# Altium PCB Car_PCB.PcbDoc (part 2 of 2)
Units mm, origin at the board's own origin, x right, y up, seen from the top; angles counter-clockwise.
Board outline 64 x 85 mm, 4 copper layers (Top Layer, Ground Plane, Power Plane, Bottom Layer), stack 0.844 mm thick; 133 components, 86 nets, 370 pads, 90 vias.
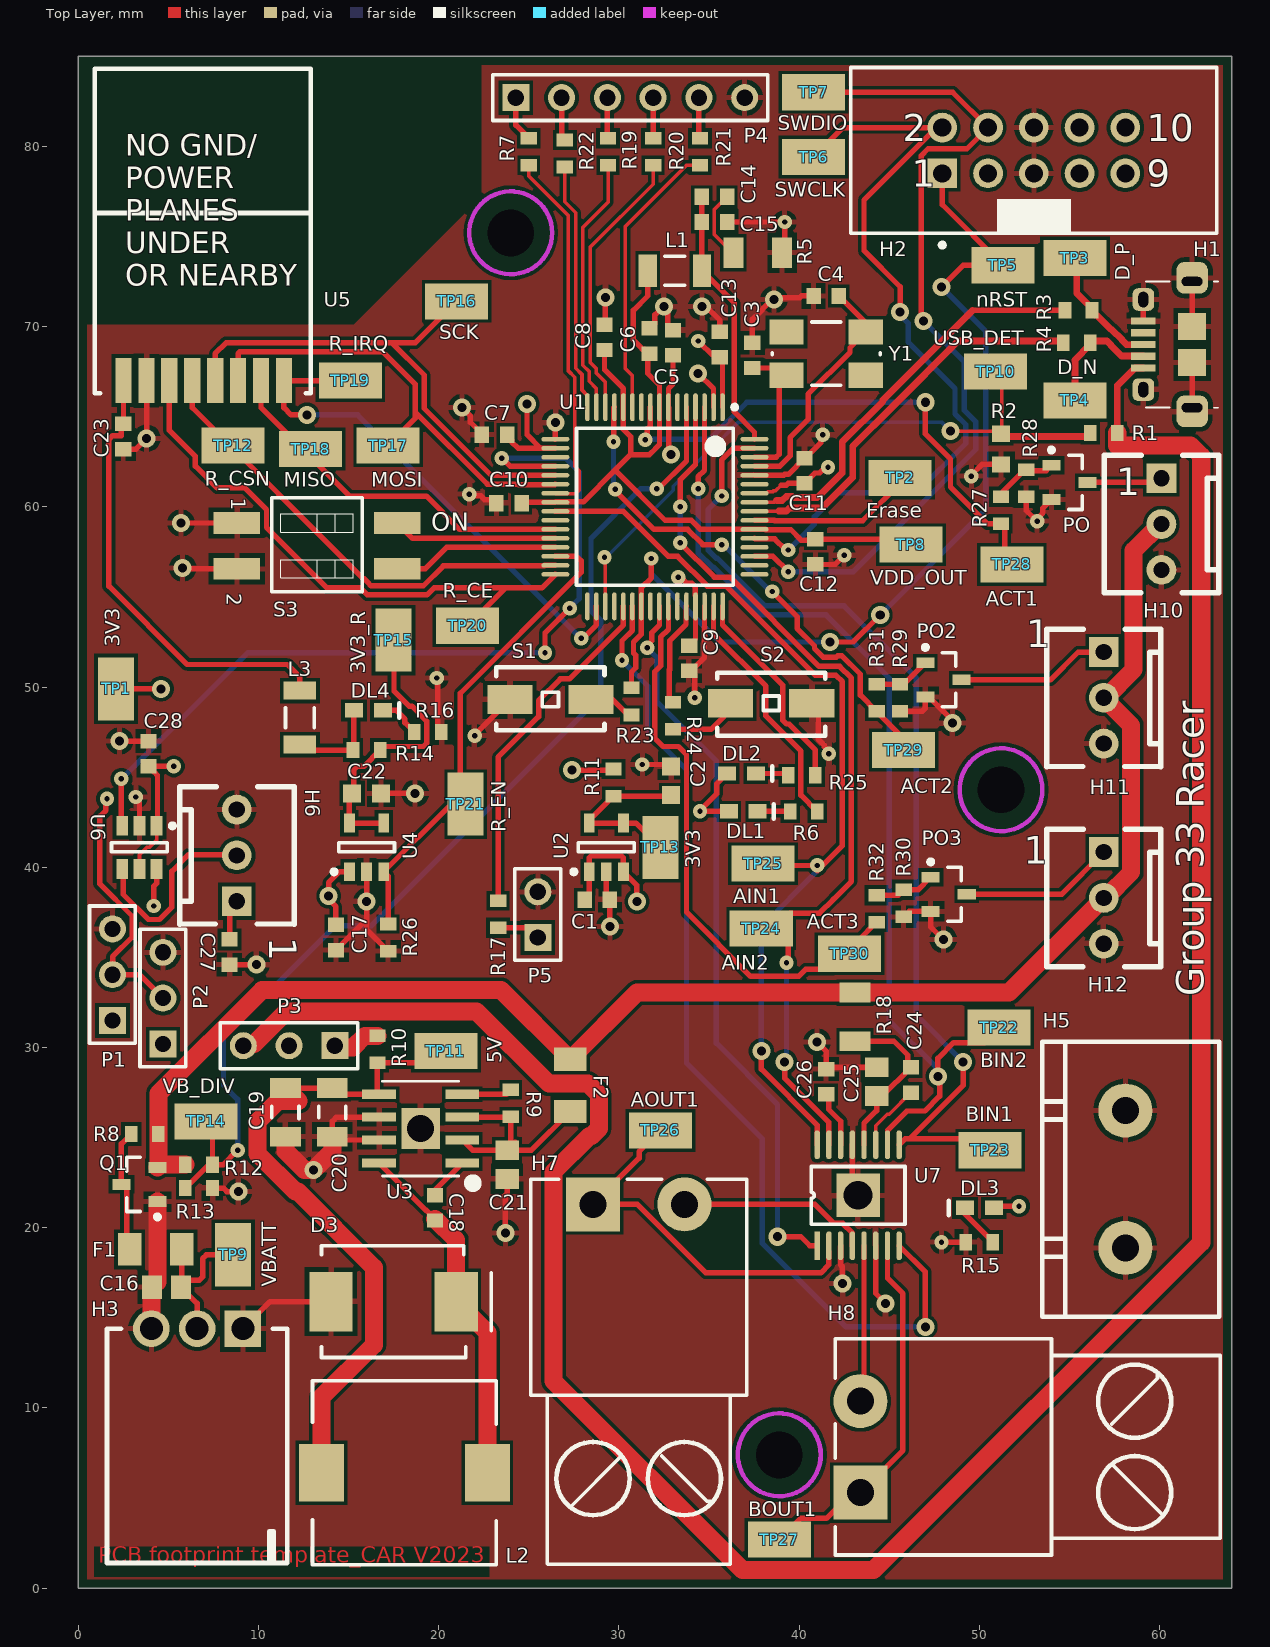
[diagram p0: Top Layer view]

## Via types
v1: diameter 0.8, hole 0.3, Top Layer to Bottom Layer, 45 vias
v2: diameter 1, hole 0.5, Top Layer to Bottom Layer, 43 vias
v3: diameter 2.2, hole 1.6, Top Layer to Bottom Layer, 1 vias
v4: diameter 2, hole 1.5, Top Layer to Bottom Layer, 1 vias

## Nets (pads, with @x,y where several pads share a name; then routed paths per layer and width w, separated by ;. In a path a pad name is that pad's centre, name@x,y a point inside that pad or via, vN(x,y) a via of type N, cw(c..) or ccw(c..) an arc to the next point about the centre after c; other vN are vias at no path point) (continued)
NetP4_5: P4.5 R21.2 | length 2.5
  Top Layer w0.3: P4.5@34.3,82.56 P4.5 34.44,80.51 R21.2
NetP5_1: P5.1 R17.2 | length 2.4
  Top Layer w0.3: R17.2 24.95,36.65 P5.1
NetPO2_1: PO2.1 R29.2 R31.2 | length 3.2
  Top Layer w0.3: R31.2 R29.2 45.8,50.15 PO2.1
NetPO3_1: PO3.1 R30.2 R32.2 | length 3.4
  Top Layer w0.3: R32.2 45.5,38.45 R30.2 46.6,38.75 PO3.1
NetPO_1: PO.1 R27.2 R28.2 | length 3.5
  Top Layer w0.3: R27.2@51.2,60.75 52.5,62.05 R28.2 52.65,62 53.7,62 PO.1
NetR3_2: R3.2 U1.57 | length 22.7
  Top Layer w0.2: U1.57 38.621,60.25 38.739,60.367
  Top Layer w0.3: 49.614,70.9 R3.2@54.699,70.9
  Top Layer w0.381: 38.739,60.346 39.061,60.346 39.298,60.584 39.614,60.584 39.688,60.509 41.027,60.509 42.391,61.873 42.391,63.588 44.641,65.838 44.641,65.926 49.614,70.9
NetR4_2: R4.2 U1.56 | length 22
  Top Layer w0.2: U1.56 38.85,59.75 38.865,59.765
  Top Layer w0.381: 38.865,59.765 39.302,59.765 39.465,59.928 41.268,59.928 42.972,61.632 42.972,63.348 45.222,65.598 45.222,65.6 48.821,69.2 R4.2@54.65,69.2
NetR7_1: R7.1 U1.23 | length 20.6
  Top Layer w0.2: R7.1 25,78.35 27.2,76.15 27.2,67.529 27.55,67.179 27.55,62.25 27.8,62 27.8,60.925 27.6,60.725 26.5,60.725 U1.23 U1.23@26.485,60.76
NetR9_2: R9.2 U3.4 | length 2.8
  Top Layer w0.3: U3.4 23.755,27.405 R9.2
NetR19_1: R19.1 U1.15 | length 14.3
  Top Layer w0.2: U1.15 28.75,66.56 28.35,66.96 28.35,67.51 28,67.86 28,75.5 29.4,76.9 R19.1
NetR20_1: R20.1 U1.14 | length 15.2
  Top Layer w0.2: U1.14 29.25,66.924 28.75,67.424 28.75,67.676 28.4,68.026 28.4,74.4 31.9,77.9 R20.1
NetR21_1: R21.1 U1.11 | length 15.7
  Top Layer w0.2: U1.11 30.75,67.269 30.35,67.669 30.35,75.55 33.75,78.95 R21.1
NetR22_1: R22.1 U1.16 | length 13.8
  Top Layer w0.2: R22.1 27,76.916 27.6,76.316 27.6,67.694 27.95,67.344 27.95,66.475 28.234,66.191 28.234,65.541 U1.16
NetR23_1: R23.1 S1.2 | length 2.4
  Top Layer w0.3: S1.2 29.65,49.3 R23.1@30.5,48.45
NetR24_1: R24.1 S2.2 | length 4.2
  Top Layer w0.3: R24.1 35.1,47.65 S2.2@36.55,49.1
NetTP2_1: TP2.1 U1.55 | length 9.1
  Top Layer w0.3: U1.55 38.616,59.25 38.641,59.225 43.525,59.225 TP2.1@45.7,61.4
nRST: H2.1 R23.2 TP5.1 U1.39 | length 55.5
  Top Layer w0.3: R23.2 30.7,50.846 30.924,51.07 30.924,51.766 30.812,51.877 30.812,52.498 31.25,52.936 U1.39 31.25,55.51 31.8,56.06 v1(31.8,57.132) ; v2(41.7,52.5) 43,52.5 v2(44.5,54) ; v2(47.9,72.2) 49.1,73.4 TP5.1 47.94,76.76 H2.1
  Bottom Layer w0.3: v1(31.8,57.132) 31.8,56.272 35.572,52.5 v2(41.7,52.5) ; v2(44.5,54) 50.35,59.85 50.35,69.75 v2(47.9,72.2)
RADIO_CE: TP20.1 U1.32 U5.3 | length 32.3
  Top Layer w0.3: U5.3 5.057,64.243 6.5,62.8 6.5,62.255 7.705,61.05 9.245,61.05 10.45,59.845 10.45,58.85 13.8,55.5 15.658,55.5 16.048,55.11 19.352,55.11 19.742,55.5 23.7,55.5 ; TP20.1 23.7,55.5 ; U1.32 25.725,55.5 23.7,55.5
RADIO_CSN: TP12.1 U1.31 U5.4 | length 26.2
  Top Layer w0.3: U5.4 6.329,65.5 15.829,56 15.874,56 16.05,55.824 16.05,55.815 16.255,55.61 19.145,55.61 20.26,56.725 25.8,56.725 25.85,56.725 25.875,56.75 U1.31
RADIO_EN: R26.2 TP21.1 U1.30 U4.3 | length 27
  Top Layer w0.3: R26.2 17.2,39.5 U4.3 20.7,43.5 TP21.1 21.198,43.802 21.198,49.651 27.9,56.353 27.9,57 27.65,57.25 U1.30
RADIO_IRQ: TP19.1 U1.34 U5.8 | length 29.2
  Top Layer w0.3: v2(12.7,65.1) 11.814,65.1 11.414,65.5 U5.8 TP19.1 ; v1(27.9,52.7) 28,52.7 28.75,53.45 U1.34
  Bottom Layer w0.3: v2(12.7,65.1) 15.5,65.1 v1(27.9,52.7)
RADIOCONFIG_0: S3.4 U1.28 | length 9.1
  Top Layer w0.3: S3.4 18.55,58.25 U1.28
RADIOCONFIG_1: S3.3 U1.29 | length 9.3
  Top Layer w0.3: S3.3 19.25,56.56 20.44,57.75 U1.29
SCK: TP16.1 U1.21 U5.5 | length 29.3
  Top Layer w0.3: U5.5 7.6,68.5 8.2,69.1 17.4,69.1 ; TP16.1 18.7,69.1 17.4,69.1 ; U1.21 22.905,61.75 19.2,65.455 19.2,67.3 17.4,69.1
SLEEP: R24.2 U1.44 | length 5.7
  Top Layer w0.3: R24.2@32.8,49.15 32.8,50.947 32.812,50.96 32.812,52.557 33.725,53.47 33.725,54.45 U1.44
STAT0: R6.2 U1.47 | length 13.8
  Top Layer w0.3: U1.47 35.25,52.945 38.15,50.045 38.15,48.398 40.1,46.448 40.1,44 R6.2
STAT1: R25.2 U1.48 | length 11.6
  Top Layer w0.3: U1.48 35.75,53.44 39.1,50.09 39.1,48.155 39.305,47.95 39.443,47.95 40.9,46.493 R25.2
SWCLK: H2.2 TP6.1 U1.53 | length 44
  Top Layer w0.3: U1.53 37.55,58.225 38.64,58.225 39.265,57.6 v1(39.4,57.6) ; TP6.1 42.44,81.04 H2.2@47.628,81.04 ; v2(45.6,70.8) 45.6,72.207 43.6,74.207 43.6,77.012 H2.2@47.628,81.04 ; H2.2 H2.2@47.628,81.04
  Bottom Layer w0.3: v1(39.4,57.6) 40.841,59.041 40.841,59.441 42.186,60.786 46.51,60.786 49.25,63.526 49.25,64.552 48.65,65.152 48.65,66.55 46.05,69.15 46.05,70.19 45.6,70.64 v2(45.6,70.8)
SWDIO: H2.4 TP7.1 U1.51 | length 47.5
  Top Layer w0.3: U1.51 38.55,57.25 v1(39.4,56.4) ; TP7.1 48.52,83 H2.4 49.305,79.865 47.16,79.865 46.765,79.47 v2@46.765,70.57
  Bottom Layer w0.3: v1(39.4,56.4) 43.007,56.4 49.8,63.193 49.8,64.709 49.15,65.359 49.15,68.05 v2(46.9,70.3)
USB_DETECT: R1.1 R2.2 TP10.1 U1.35 | length 37
  Top Layer w0.2: v1(29.2,57.2) 29.25,57.15 U1.35 ; v2(48.4,64.2) 51.05,64.2 R2.2 ; TP10.1 51.25,67.15 R2.2@51.25,64.1
  Top Layer w0.381: R2.2@51.25,64.1 R2.2 51.35,63.9 55.991,63.9 56.15,64.06 R1.1
  Bottom Layer w0.2: v1(29.2,57.2) 29.29,57.2 33.009,60.919 33.009,61.132 35.178,63.3 35.236,63.3 36.636,64.7 47.9,64.7 v2(48.4,64.2)
VBATT_DIVIDED: R12.1 R13.2 TP14.1 U1.5 | length 61.2
  Top Layer w0.3: R13.2 7.25,23.5 R12.1 ; TP14.1@6.975,26.025 TP14.1 ; TP14.1@7.263,26.238 TP14.1@7.512,25.988 ; TP14.1@7.45,25.95 R12.1 ; v1(8.85,24.3) 8.05,23.5 R12.1 ; v1(32.1,61) 32.202,61 33.75,62.548 U1.5
  Bottom Layer w0.3: v1(8.85,24.3) 8.85,27.125 8.06,27.915 8.06,30.556 14.254,36.75 16.252,36.75 29,49.498 29,53.679 28.45,54.229 28.45,58.25 31.2,61 v1(32.1,61)
VBATT_FSD: F2.1 H10.2 H11.2 H12.2 Q1.2 R8.2 R12.2 R18.2 | length 89.3
  Top Layer w1: Q1.2 Q1.2@4.45,23.4 ; R12.2 4.55,23.5 Q1.2@4.45,23.4 ; H10.2@60.1,59.1 58.561,57.561 58.561,50.96 57.001,49.4 H11.2 58.426,47.874 58.426,39.725 57.001,38.3 H12.2 51.65,33.05 R18.2 31,33.05 F2.1 23.45,33.2 10.209,33.2 4.45,27.441 R8.2 Q1.2@4.45,23.4
VBUS: H1.1 P3.3 R1.2 | length 141
  Top Layer w0.381: R1.2 57.65,66.725 58.625,67.7 H1.1
  Top Layer w1: P3.3 9.256,30.196 9.745,30.196 11.549,32 22.11,32 26.11,28 28.29,28 28.9,27.39 28.9,25.51 28.49,25.1 28.37,25.1 26.36,23.09 26.36,11.5 36.86,1 44.131,1 62.31,19.179 62.31,62.814 61.724,63.4 57.65,63.4 R1.2
pads on no net: H1.4 H2.3 H2.9 H2.10 MT1.1 MT2.1 MT3.1 U1.6 U1.10 U1.19 U1.26 U1.33 U1.36 U1.40 U1.43 U1.49 U1.50 U1.52 U1.59 Y1.2 Y1.4

## Polygon pours and split planes (outlines as drawn)
GND on Bottom Layer "GND_L04_P001" (solid, remove dead copper, pour order 1): 0.4,84.5 0.4,0.6 63.6,0.6 63.6,84.9 0.8,84.9
GND on Top Layer "GND_L01_P000" (solid, remove dead copper, pour order 0): 0.4,0.5 63.8,0.5 63.8,84.2 63.4,84.6 0.3,84.6
GND on Ground Plane (split plane): 63.49,0.51 0.51,0.51 0.51,70.19 0.6,70.1 15.7,70.1 22.4,76.8 22.4,84.49 63.49,84.49
3V3 on Power Plane (split plane): 63.49,0.51 32.729,0.51 32.729,41.1 32.72,41.15 32.692,41.192 32.65,41.22 32.6,41.229 0.51,41.229 0.51,70 15.1,70 22.4,77.3 22.4,84.49 63.49,84.49
5V on Power Plane (split plane): 32.471,0.51 0.51,0.51 0.51,40.971 32.471,40.971

## Other copper
Top Layer:
  pour cut-out: 0.4,84.6 0.5,84.5 0.5,70.1 15.3,70.1 22.4,77.2 22.4,84.6 0.3,84.6
  text "PCB footprint template_CAR V2023" at 1.1,1.1 h1.52
Bottom Layer:
  pour cut-out: 0.5,70.1 15.3,70.1 22.4,77.2 22.4,84.6 0.5,84.6
Ground Plane (plane layer: these items are gaps in the copper):
  pour cut-out: 0.5,84.5 0.5,70.2 0.6,70.1 15.7,70.1 22.4,76.8 22.4,84.5
Power Plane (plane layer: these items are gaps in the copper):
  pour cut-out: 0.4,84.6 0.4,70 15.1,70 22.4,77.3 22.4,84.7 0.2,84.7
  lines w0.254: 0.1,41.1 32.6,41.1 32.6,-0.2

## Silkscreen, mask and mechanical layers (free items; w line width, h text height)
Top Overlay:
  text "Group 33 Racer" at 62.438,32.854 h1.52 r90
Board Outline:
  the board outline again, w0.254

## Dimensions
0,86 to 64,86 on Mechanical 1
65,85 to 65,0 on Mechanical 1

## Text inside footprints (layer, text, board x,y; h text height)
H1: Mechanical 1 "PCB Edge" at 64.07,66.85 h0.52 r90
H2: Top Overlay "2" at 45.74,80.29 h1.5; Top Overlay "1" at 46.24,77.75 h1.5; Top Overlay "10" at 59.3,80.29 h1.5; Top Overlay "9" at 59.3,77.75 h1.5
H6: Top Overlay "1" at 10.6,36.12 h1.52 r270
H10: Top Overlay "1" at 57.6,60.64 h1.52
H11: Top Overlay "1" at 52.6,52.2 h1.52
H12: Top Overlay "1" at 52.455,40.205 h1.52
S3: Top Overlay "2" at 8.25,55.2 h0.8 r270; Top Overlay "1" at 8.5,60.5 h0.8 r270; Top Overlay "ON" at 19.6,58.66 h1
U3: Mechanical 13 "*" at 20.93,24.344 h1.27 r180
U5: Top Overlay "NO GND/ / POWER / PLANES / UNDER / OR NEARBY" at 2.614,72.275 h1.2